# EAGLE board Layout_PCB_Fusion (EAGLE 9.7.0)
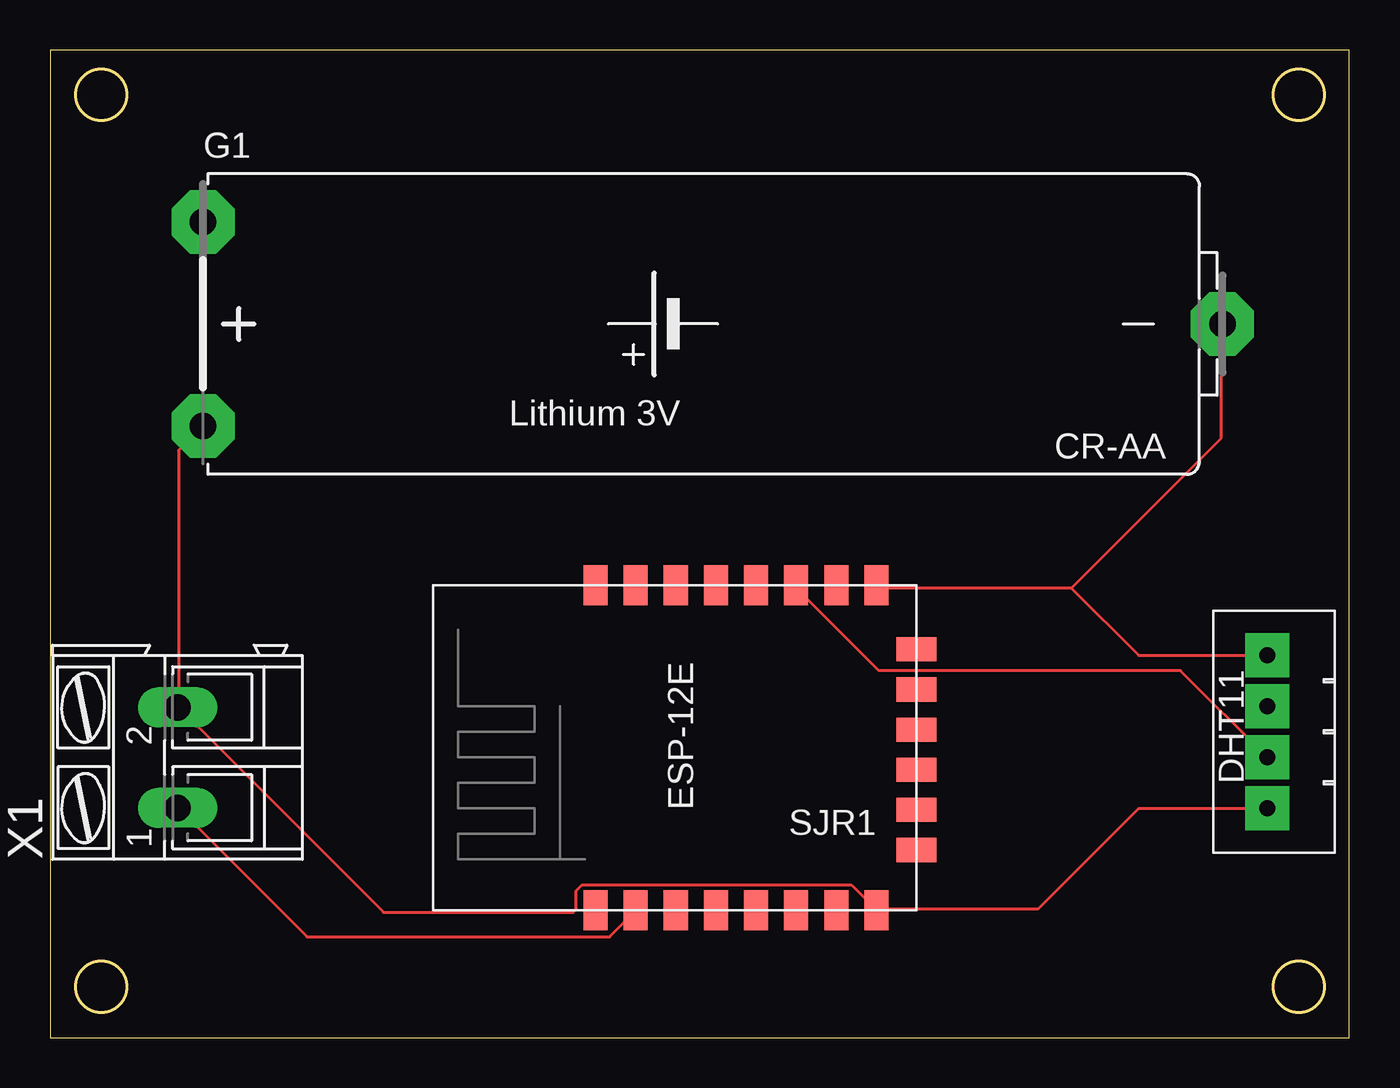
[diagram p0: board, top side]

Size 64.75 x 49.2 mm. Coordinates in mm from the lower left corner, seen from the top.
Outline: 0,0 64.75,0 64.75,49.2 0,49.2 0,0
Outline: circle at 2.54,46.99 radius 1.27
Outline: circle at 62.23,46.99 radius 1.27
Outline: circle at 62.23,2.54 radius 1.27
Outline: circle at 2.54,2.54 radius 1.27
Copper layers (1*16): Top 0.035mm / dielectric 1.5mm / Bottom 0.035mm
Design rules "default": minimum track width 6mil, minimum drill 0.35mm, track to track 6mil, track to pad 6mil, pad to pad 6mil, via to via 6mil, smd to smd 6mil, copper to edge 40mil, drill to drill 6mil, minimum pad ring 10mil, minimum via ring 8mil, stop-mask expansion 4mil, vias tented up to drill 0mil, thermal gap 10mil

## Footprints (pad centres in the part's own frame; a part is rotated, then mirrored left to right if it is on the bottom)
CRAA = drill 1.321 pad 3.15 octagon: + -25.4,-5.08; +@1 -25.4,5.08; - 25.4,0
ESP8266-ESP12E = smd 2 x 1.2: 1 -7.62,5.84; 2 -7.62,3.84; 3 -7.62,1.84; 4 -7.62,-0.16; 5 -7.62,-2.16; 6 -7.62,-4.16; 7 -7.62,-6.16; 8 -7.62,-8.16; 9 8.58,-8.16; 10 8.58,-6.16; 11 8.58,-4.16; 12 8.58,-2.16; 13 8.58,-0.16; 14 8.58,1.84; 15 8.58,3.84; 16 8.58,5.84 | smd 1.2 x 2: 17 -4.62,-10.16; 18 -2.62,-10.16; 19 -0.62,-10.16; 20 1.38,-10.16; 21 3.38,-10.16; 22 5.38,-10.16
DHT11-PION. = drill 0.8 pad 2.184 square: DATA -1.27,0.305; GND 3.81,0.305; NO 1.27,0.305; VCC -3.81,0.305
AK300/2 = drill 1.321 long: 1 -2.515,0; 2 2.489,0

## Placement (x,y rotation side)
G1  CR-AA  [CRAA]  33.02,35.56 0 top
SJR1  [ESP8266-ESP12E]  33.02,13.97 90 top
U$1  DHT11-PION.  [DHT11-PION.]  60.96,15.24 90 top
X1  [AK300/2]  6.35,13.97 90 top

## Library data of the parts
G1 = battery
SJR1 = esp12e
U$1 = DHT11
X1 = con-ptr500; OC_FARNELL: unknown; OC_NEWARK: unknown

## Nets
N$1: SJR1.2 X1.1
N$2: G1.+ SJR1.8 U$1.VCC X1.2
N$3: SJR1.11 U$1.DATA
N$4: G1.- SJR1.9 U$1.GND

## Tracks (layer width: path | path; a pad name or v marks a point on that pad's centre or on a via)
N$1
  Top 0.152: SJR1.2 29.11,6.25 27.89,5.03 12.8,5.03 6.4,11.43 X1.1
N$2
  Top 0.152: U$1.VCC 54.25,11.43 49.23,6.4 41.3,6.4 SJR1.8 41.15,6.4 39.93,7.62 26.52,7.62 26.21,7.32 26.21,6.4 26.06,6.25 16.61,6.25 6.4,16.46 | 6.4,16.46 6.4,29.26 G1.+ | 6.4,16.46 X1.2
N$3
  Top 0.152: U$1.DATA 56.34,18.29 41.3,18.29 37.19,22.4 SJR1.11
N$4
  Top 0.152: 50.9,22.4 41.3,22.4 SJR1.9 | 50.9,22.4 54.25,19.05 U$1.GND | 50.9,22.4 58.37,29.87 58.37,35.51 G1.-